# Altium PCB BDCMC_V2.PcbDoc
Units mil, origin at the board's own origin, x right, y up, seen from the top; angles counter-clockwise.
Board outline 7000 x 2000 mil, 4 copper layers (Top Layer, Layer 1, Layer 2, Bottom Layer), stack 68.789 mil thick; 190 components, 102 nets, 647 pads, 27 vias.
Unrouted connection lines stored in the file: 456.
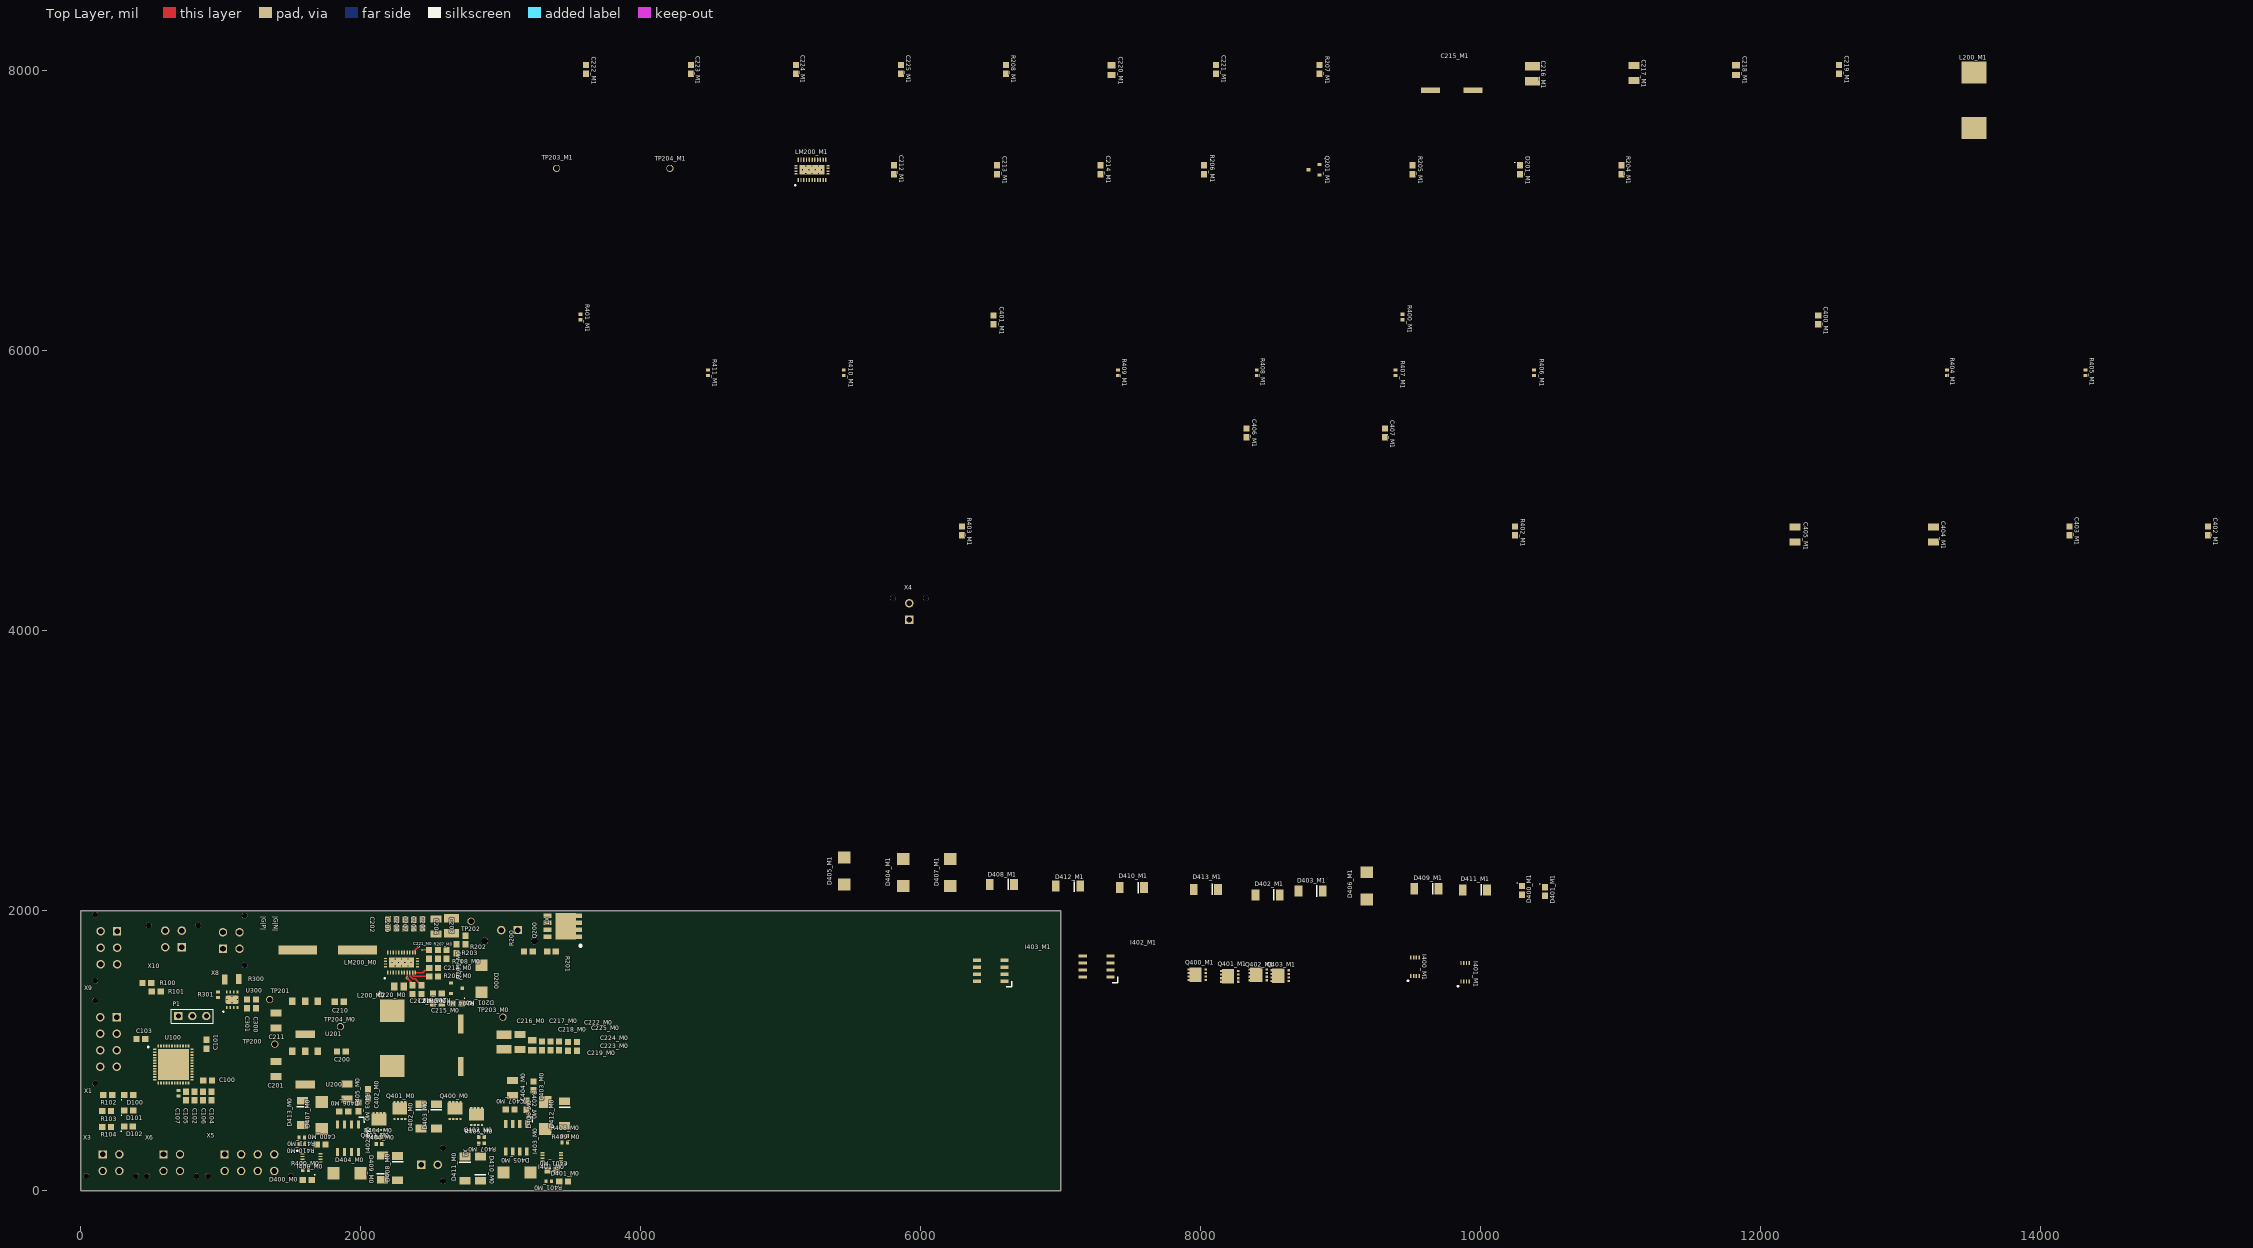
[diagram p0: Top Layer view]
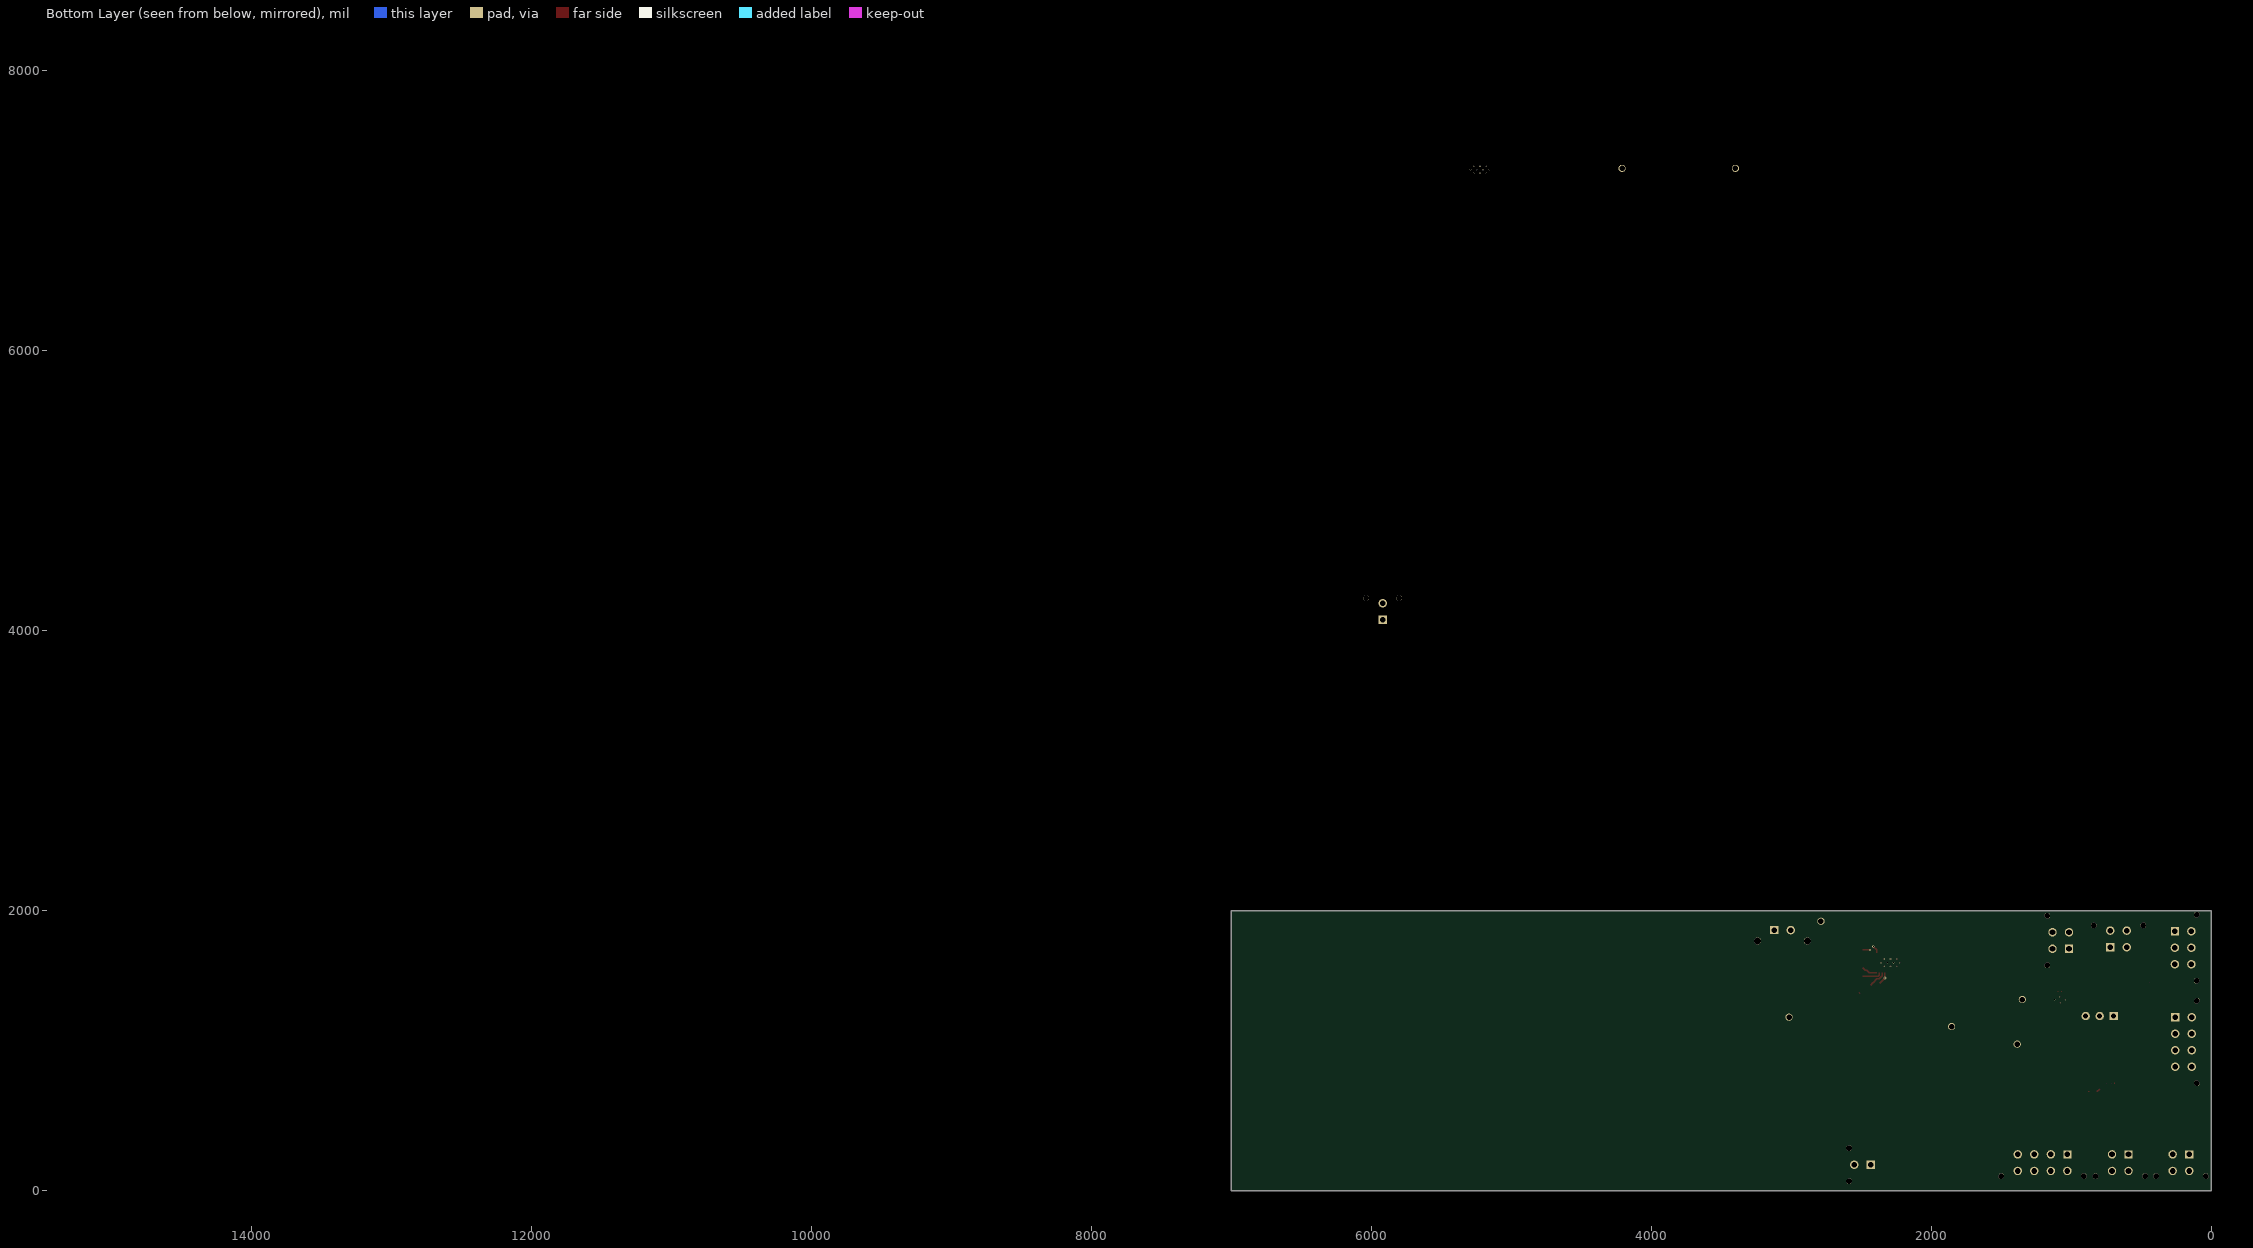
[diagram p1: Bottom Layer view, seen from below]

## Layer stack, top to bottom
Top Solder: solder mask 0.5, Solder Resist, Dk 3.8
Top Layer: signal copper 1.378
Dielectric 2: prepreg 2.8, PP-006, Dk 4.6
Layer 1: signal copper 1.378
Dielectric 1: core 57.677, FR-4, Dk 4.5
Layer 2: signal copper 1.378
Dielectric 3: prepreg 2.8, PP-006, Dk 4.6
Bottom Layer: signal copper 1.378
Bottom Solder: solder mask 0.5, Solder Resist, Dk 3.8

## Board outline
0,0 7000,0 7000,2000 0,2000

## Design rules (kind name [scope] priority, off if disabled: settings)
Clearance [All] p1: gap=10 ignorepadtopadclearanceinfootprint=FALSE except(7: Arc-Arc Arc-Track Arc-SMDPad Track-Track Track-SMDPad SMDPad-SMDPad)
DiffPairsRouting DiffPair_DiffPairsRouting [InDifferentialPair ('CAN')] p1: maxlimit=10 minlimit=5 mostfreqgap=5 toplayer_minwidth=7 toplayer_maxwidth=10 toplayer_prefwidth=7 midlayer1_minwidth=7 midlayer1_maxwidth=10 midlayer1_prefwidth=7 midlayer2_minwidth=7 midlayer2_maxwidth=10 midlayer2_prefwidth=7 bottomlayer_minwidth=7 bottomlayer_maxwidth=10 bottomlayer_prefwidth=7 maxuncoupledlength=500
DiffPairsRouting [All] p2: maxlimit=10 minlimit=10 mostfreqgap=10 toplayer_minwidth=15 toplayer_maxwidth=15 toplayer_prefwidth=15 midlayer1_minwidth=15 midlayer1_maxwidth=15 midlayer1_prefwidth=15 midlayer2_minwidth=15 midlayer2_maxwidth=15 midlayer2_prefwidth=15 bottomlayer_minwidth=15 bottomlayer_maxwidth=15 bottomlayer_prefwidth=15 maxuncoupledlength=500
MatchedLengths DiffPair_MatchedLengths [InDifferentialPair ('CAN')] p1: tolerance=1000 checknetsindiffpair=FALSE checkdiffpairvsdiffpair=TRUE checkxsignals=TRUE checkothers=TRUE
PolygonConnect [All] p1: connectstyle=Relief reliefconductorwidth=10 reliefentries=4 polygonreliefangle="90 Angle" airgapwidth=10
RoutingVias [All] p1: holewidth=28 width=50 viastyle="Through Hole" minholewidth=28 minwidth=50 maxholewidth=28 maxwidth=50
SolderMaskExpansion [All] p1: expansion=4 istentingtop=FALSE
Width [All] p1: maxlimit=10 minlimit=10 preferedwidth=10
29 further rules are at their usual default settings.

## Classes and differential pairs
channel class HB: M0 M1
channel class DirCtl: M0 M1
channel class Buck: M0 M1
component class TCAN1042: C300 C301 R300 R301 U300
component class Power: C200 C201 C202 C203 C204 C205 C206 C207 C208 C209 C210 C211 D200 Q200 R200 R201 R202 R203 TP200 TP201 TP202 U200 U201
component class MCU: C100 C101 C102 C103 C104 C105 C106 C107 D100 D101 D102 R100 R101 R102 R103 R104 U100
component class M1: C400_M1 C401_M1 D400_M1 D401_M1 I400_M1 I401_M1 R400_M1 R401_M1
component class M1: C212_M1 C213_M1 C214_M1 C215_M1 C216_M1 C217_M1 C218_M1 C219_M1 C220_M1 C221_M1 C222_M1 C223_M1 C224_M1 C225_M1 D201_M1 L200_M1 LM200_M1 Q201_M1 R204_M1 R205_M1 R206_M1 R207_M1 R208_M1 TP203_M1 TP204_M1
component class M1: C402_M1 C403_M1 C404_M1 C405_M1 C406_M1 C407_M1 D402_M1 D403_M1 D404_M1 D405_M1 D406_M1 D407_M1 D408_M1 D409_M1 D410_M1 D411_M1 D412_M1 D413_M1 I402_M1 I403_M1 Q400_M1 Q401_M1 Q402_M1 Q403_M1 R402_M1 R403_M1 R404_M1 R405_M1 R406_M1 R407_M1 R408_M1 R409_M1 R410_M1 R411_M1
component class M0: C400_M0 C401_M0 D400_M0 D401_M0 I400_M0 I401_M0 R400_M0 R401_M0
component class M0: C212_M0 C213_M0 C214_M0 C215_M0 C216_M0 C217_M0 C218_M0 C219_M0 C220_M0 C221_M0 C222_M0 C223_M0 C224_M0 C225_M0 D201_M0 L200_M0 LM200_M0 Q201_M0 R204_M0 R205_M0 R206_M0 R207_M0 R208_M0 TP203_M0 TP204_M0
component class M0: C402_M0 C403_M0 C404_M0 C405_M0 C406_M0 C407_M0 D402_M0 D403_M0 D404_M0 D405_M0 D406_M0 D407_M0 D408_M0 D409_M0 D410_M0 D411_M0 D412_M0 D413_M0 I402_M0 I403_M0 Q400_M0 Q401_M0 Q402_M0 Q403_M0 R402_M0 R403_M0 R404_M0 R405_M0 R406_M0 R407_M0 R408_M0 R409_M0 R410_M0 R411_M0
component class Designator: P1 X1 X2 X3 X4 X5 X6 X7 X8 X9 X10
differential pair CAN: +CAN_P -CAN_N

## Components (designator, comment, footprint, x,y, rotation, side; value= is the part's Value field where it differs from the comment)
C100 "TMK107BBJ475KA-T" CAP-0603 905.51,787.4 r0 top
C101 "CC0603KRX7R0BB104" CAP-0603 897.64,1047.24 r90 top
C102 "CC0603KRX7R0BB104" CAP-0603 812.7,677.17 r270 top
C103 "CC0603KRX7R0BB104" CAP-0603 429.13,1083.69 r180 top
C104 "UMK107AB7105KA-T" CAP-0603 935.33,677.17 r270 top
C105 "CC0603KRX7R0BB104" CAP-0603 751.38,677.17 r270 top
C106 "UMK107AB7105KA-T" CAP-0603 874.02,677.17 r270 top
C107 "CC0402KRX7R0BB103" CAP-0402 696.85,696.85 r270 top
C200 "CGA3E3X7R1H334K080AB" CAP-0603 1862.2,996.06 r0 top
C201 "CL31B106KBHNNNE" CAP-1206 1393.7,870.08 r270 top
C202 "100SEV100M12.5X16" ELEC-100U-0001 1763.78,1719.54 r270 top
C203 "C3225X7R1N106K250AC" CAP-1210 2649.61,1893.7 r90 top
C204 "CL31B105KCHNNNE" CAP-1206 2536.18,1887.87 r90 top
C205 "CC0603KRX7R0BB104" CAP-0603 2441.18,1907.87 r90 top
C206 "C1608C0G2A103J080AC" CAP-0603 2378.81,1905.51 r90 top
C207 "C0603Y102K1RAC7867" CAP-0603 2317.49,1905.51 r90 top
C208 "0603N101J101CT" CAP-0603 2256.18,1907.87 r90 top
C209 "0603N100J500CT" CAP-0603 2192.91,1909.45 r90 top
C210 "CGA3E3X7R1H334K080AB" CAP-0603 1846.46,1350.39 r0 top
C211 "CL31B106KBHNNNE" CAP-1206 1393.7,1216.54 r270 top
C212_M0 "UMK107BBJ225KA-T" CAP-0603 2370.08,1437.01 r270 top (schematic designator C212)
C212_M1 "UMK107BBJ225KA-T" CAP-0603 5808.27,7292.64 r90 top (schematic designator C212)
C213_M0 "UMK107BBJ225KA-T" CAP-0603 2433.07,1437.11 r270 top (schematic designator C213)
C213_M1 "UMK107BBJ225KA-T" CAP-0603 6543.27,7292.64 r90 top (schematic designator C213)
C214_M0 "CC0603KRX7R9BB333" CAP-0603 2519.68,1592.23 r0 top (schematic designator C214)
C214_M1 "CC0603KRX7R9BB333" CAP-0603 7283.27,7292.64 r90 top (schematic designator C214)
C215_M0 "50TZV220M10X10.5" ELEC-220U-0003 2712.6,1039.37 r0 top (schematic designator C215)
C215_M1 "50TZV220M10X10.5" ELEC-220U-0003 9792.56,7859.17 r90 top (schematic designator C215)
C216_M0 "C3225X7R1N106K250AC" CAP-1210 3023.62,1062.99 r90 top (schematic designator C216)
C216_M1 "C3225X7R1N106K250AC" CAP-1210 10367.56,7979.17 r90 top (schematic designator C216)
C217_M0 "CL31B105KCHNNNE" CAP-1206 3137.8,1062.99 r90 top (schematic designator C217)
C217_M1 "CL31B105KCHNNNE" CAP-1206 11092.56,7984.17 r90 top (schematic designator C217)
C218_M0 "KAM21KR72A474KL" CAP-0805 3224.41,1039.37 r90 top (schematic designator C218)
C218_M1 "KAM21KR72A474KL" CAP-0805 11822.56,8004.17 r90 top (schematic designator C218)
C219_M0 "CC0603KRX7R0BB104" CAP-0603 3293.01,1035.43 r90 top (schematic designator C219)
C219_M1 "CC0603KRX7R0BB104" CAP-0603 12557.56,8009.17 r90 top (schematic designator C219)
C220_M0 "KAM21KR72A474KL" CAP-0805 2272.44,1460.63 r180 top (schematic designator C220)
C220_M1 "KAM21KR72A474KL" CAP-0805 7362.56,8004.17 r90 top (schematic designator C220)
C221_M0 "885012006087" CAP-0603 2488.19,1688.98 r270 top (schematic designator C221)
C221_M1 "885012006087" CAP-0603 8107.56,8009.17 r90 top (schematic designator C221)
C222_M0 "C1608C0G2A103J080AC" CAP-0603 3356.01,1035.43 r90 top (schematic designator C222)
C222_M1 "C1608C0G2A103J080AC" CAP-0603 3607.56,8009.17 r90 top (schematic designator C222)
C223_M0 "C0603Y102K1RAC7867" CAP-0603 3543.31,1031.5 r90 top (schematic designator C223)
C223_M1 "C0603Y102K1RAC7867" CAP-0603 4357.56,8009.17 r90 top (schematic designator C223)
C224_M0 "0603N101J101CT" CAP-0603 3480.32,1031.5 r90 top (schematic designator C224)
C224_M1 "0603N101J101CT" CAP-0603 5107.56,8009.17 r90 top (schematic designator C224)
C225_M0 "0603N100J500CT" CAP-0603 3417.32,1035.43 r90 top (schematic designator C225)
C225_M1 "0603N100J500CT" CAP-0603 5857.56,8009.17 r90 top (schematic designator C225)
C300 "TMK107BBJ475KA-T" CAP-0603 1251.02,1335 r90 top
C301 "CC0603KRX7R0BB104" CAP-0603 1186.02,1335 r90 top
C400_M0 "CC0603KRX7R0BB104" CAP-0603 1716.51,331.58 r180 top (schematic designator C400)
C400_M1 "CC0603KRX7R0BB104" CAP-0603 12410,6220 r90 top (schematic designator C400)
C401_M0 "CC0603KRX7R0BB104" CAP-0603 3366.11,146.86 r180 top (schematic designator C401)
C401_M1 "CC0603KRX7R0BB104" CAP-0603 6520,6220 r90 top (schematic designator C401)
C402_M0 "C1608C0G2A103J080AC" CAP-0603 2051.15,693.79 r90 top (schematic designator C402)
C402_M1 "C1608C0G2A103J080AC" CAP-0603 15194.06,4712.76 r90 top (schematic designator C402)
C403_M0 "C1608C0G2A103J080AC" CAP-0603 3233.99,748.9 r90 top (schematic designator C403)
C403_M1 "C1608C0G2A103J080AC" CAP-0603 14204.06,4712.76 r90 top (schematic designator C403)
C404_M0 "CAP-1U-0001" "CAP-1206 - duplicate" 3082.65,729.22 r90 top (schematic designator C404)
C404_M1 "CAP-1U-0001" "CAP-1206 - duplicate" 13234.06,4682.76 r90 top (schematic designator C404)
C405_M0 "CAP-1U-0001" CAP-1206 1901.55,709.53 r90 top (schematic designator C405)
C405_M1 "CAP-1U-0001" CAP-1206 12244.06,4687.76 r90 top (schematic designator C405)
C406_M0 "CC0603KRX7R0BB104" CAP-0603 1877.92,567.8 r180 top (schematic designator C406)
C406_M1 "CC0603KRX7R0BB104" CAP-0603 8325,5413.54 r90 top (schematic designator C406)
C407_M0 "CC0603KRX7R0BB104" CAP-0603 3066.9,579.61 r180 top (schematic designator C407)
C407_M1 "CC0603KRX7R0BB104" CAP-0603 9315,5413.54 r90 top (schematic designator C407)
D100 "150060AS75000" LED-0603 342.52,685.04 r180 top
D101 "150060AS75000" LED-0603 342.52,574.8 r180 top
D102 "150060AS75000" LED-0603 341.02,458.87 r180 top
D200 "SMBJE43CAH" "DO-214AA (SMBJ)" 2862.2,1515.75 r270 top
D201_M0 "150060AS75000" LED-0603 2688.98,1339.36 r0 top (schematic designator D201)
D201_M1 "150060AS75000" LED-0603 10278.27,7292.64 r90 top (schematic designator D201)
D400_M0 "150060AS75000" LED-0603 1618.08,78.75 r0 top (schematic designator D400)
D400_M1 "150060AS75000" LED-0603 10295.28,2145.67 r90 top (schematic designator D400)
D401_M0 "150060AS75000" LED-0603 3448.79,67.8 r0 top (schematic designator D401)
D401_M1 "150060AS75000" LED-0603 10456.69,2137.8 r90 top (schematic designator D401)
D402_M0 "PMEG6030EP,115" DIO-SOD128 2430.91,532.37 r180 top (schematic designator D402)
D402_M1 "PMEG6030EP,115" DIO-SOD128 8476.38,2114.17 r90 top (schematic designator D402)
D403_M0 "PMEG6030EP,115" DIO-SOD128 2539.34,532.37 r180 top (schematic designator D403)
D403_M1 "PMEG6030EP,115" DIO-SOD128 8783.46,2141.73 r90 top (schematic designator D403)
D404_M0 "SMBJ12CA" "DO-214AA (SMBJ)" 1901.55,126.94 r0 top (schematic designator D404)
D404_M1 "SMBJ12CA" "DO-214AA (SMBJ)" 5874.02,2272.28 r90 top (schematic designator D404)
D405_M0 "SMBJ12CA" "DO-214AA (SMBJ)" 3118.08,130.87 r180 top (schematic designator D405)
D405_M1 "SMBJ12CA" "DO-214AA (SMBJ)" 5452.76,2283.46 r90 top (schematic designator D405)
D406_M0 "SMBJ12CA" "DO-214AA (SMBJ)" 3316.99,536.44 r90 top (schematic designator D406)
D406_M1 "SMBJ12CA" "DO-214AA (SMBJ)" 9185.04,2177.17 r90 top (schematic designator D406)
D407_M0 "SMBJ12CA" "DO-214AA (SMBJ)" 1720.44,536.31 r90 top (schematic designator D407)
D407_M1 "SMBJ12CA" "DO-214AA (SMBJ)" 6208.66,2271.65 r90 top (schematic designator D407)
D408_M0 "PMEG6030EP,115" DIO-SOD128 2263.75,162.37 r180 top (schematic designator D408)
D408_M1 "PMEG6030EP,115" DIO-SOD128 6578.74,2188.98 r90 top (schematic designator D408)
D409_M0 "PMEG6030EP,115" DIO-SOD128 2153.52,166.31 r0 top (schematic designator D409)
D409_M1 "PMEG6030EP,115" DIO-SOD128 9610.24,2157.48 r90 top (schematic designator D409)
D410_M0 "PMEG6030EP,115" DIO-SOD128 2854.3,158.43 r0 top (schematic designator D410)
D410_M1 "PMEG6030EP,115" DIO-SOD128 7507.87,2165.35 r90 top (schematic designator D410)
D411_M0 "PMEG6030EP,115" DIO-SOD128 2744.07,158.43 r180 top (schematic designator D411)
D411_M1 "PMEG6030EP,115" DIO-SOD128 9956.69,2149.61 r90 top (schematic designator D411)
D412_M0 "PMEG6030EP,115" DIO-SOD128 3456.67,552.05 r180 top (schematic designator D412)
D412_M1 "PMEG6030EP,115" DIO-SOD128 7051.18,2177.17 r90 top (schematic designator D412)
D413_M0 "PMEG6030EP,115" DIO-SOD128 1582.65,555.99 r180 top (schematic designator D413)
D413_M1 "PMEG6030EP,115" DIO-SOD128 8035.43,2153.54 r90 top (schematic designator D413)
I400_M0 "SN74LVC2G157DCUR" IC-MUX-8VSSOP 1582.65,205.92 r0 top (schematic designator I400)
I400_M1 "SN74LVC2G157DCUR" IC-MUX-8VSSOP 9559.06,1535.43 r90 top (schematic designator I400)
I401_M0 "SN74LVC2G157DCUR" IC-MUX-8VSSOP 3429.11,272.53 r180 top (schematic designator I401)
I401_M1 "SN74LVC2G157DCUR" IC-MUX-8VSSOP 9917.32,1496.06 r90 top (schematic designator I401)
I402_M0 "UCC27284QDQ1" IC-BUCK-8SOIC 1909.42,374.97 r180 top (schematic designator I402)
I402_M1 "UCC27284QDQ1" IC-BUCK-8SOIC 7255.91,1602.36 r90 top (schematic designator I402)
I403_M0 "UCC27284QDQ1" IC-BUCK-8SOIC 3110.21,378.91 r180 top (schematic designator I403)
I403_M1 "UCC27284QDQ1" IC-BUCK-8SOIC 6500,1570.87 r90 top (schematic designator I403)
L200_M0 "SRP1270-100M" PWRIND-10U-0002 2224.41,1089.27 r270 top (schematic designator L200)
L200_M1 "SRP1270-100M" PWRIND-10U-0002 13522.56,7789.17 r90 top (schematic designator L200)
LM200_M0 "LM76005RNPR" IC-30-WQFN(6x4) 2291.34,1629.92 r90 top (schematic designator LM200)
LM200_M1 "LM76005RNPR" IC-30-WQFN(6x4) 5223.27,7292.64 r90 top (schematic designator LM200)
P1 "Header 3" HDR1X3 696.85,1248.03 r0 top
Q200 "TPH7R006PL,L1Q" NMOS-8PowerVDFN 3554.57,1814.76 r90 top
Q201_M0 "T2N7002AK,LM" NMOS-SOT23-3 2685.04,1446.85 r270 top (schematic designator Q201)
Q201_M1 "T2N7002AK,LM" NMOS-SOT23-3 8808.27,7292.64 r90 top (schematic designator Q201)
Q400_M0 "TPN11006PL,LQ" NMOS-8TSON 2673.2,573.71 r0 top (schematic designator Q400)
Q400_M1 "TPN11006PL,LQ" NMOS-8TSON 7974.41,1543.31 r90 top (schematic designator Q400)
Q401_M0 "TPN11006PL,LQ" NMOS-8TSON 2279.5,573.71 r0 top (schematic designator Q401)
Q401_M1 "TPN11006PL,LQ" NMOS-8TSON 8206.69,1531.5 r90 top (schematic designator Q401)
Q402_M0 "TPN11006PL,LQ" NMOS-8TSON 2826.74,530.48 r0 top (schematic designator Q402)
Q402_M1 "TPN11006PL,LQ" NMOS-8TSON 8409.45,1542.32 r90 top (schematic designator Q402)
Q403_M0 "TPN11006PL,LQ" NMOS-8TSON 2129.89,495.05 r0 top (schematic designator Q403)
Q403_M1 "TPN11006PL,LQ" NMOS-8TSON 8566.93,1536.42 r90 top (schematic designator Q403)
R100 "AF0603FR-074K7L" RES-0603 472.44,1484.25 r0 top
R101 "AF0603FR-074K7L" RES-0603 539.37,1422.93 r180 top
R102 "AC0603FR-10100RL" RES-0603 192.91,685.04 r180 top
R103 "AC0603FR-10100RL" RES-0603 185.04,570.87 r180 top
R104 "AC0603FR-10100RL" RES-0603 185.04,456.69 r180 top
R200 "ERJ-3EKF2003V" RES-0603 3196.85,1708.66 r180 top
R201 "RC0603FR-07100KL" RES-0603 3362.2,1708.66 r0 top
R202 "RC0603FR-072M15L" RES-0603 2748.03,1791.34 r90 top
R203 "RC0603FR-07100KL" RES-0603 2685.04,1728.35 r270 top
R204_M0 "AC0603FR-10100RL" RES-0603 2547.24,1338.58 r0 top (schematic designator R204)
R204_M1 "AC0603FR-10100RL" RES-0603 11003.27,7292.64 r90 top (schematic designator R204)
R205_M0 "RC0603FR-0710KP" RES-0603 2547.24,1409.45 r180 top (schematic designator R205)
R205_M1 "RC0603FR-0710KP" RES-0603 9513.27,7292.64 r90 top (schematic designator R205)
R206_M0 "RC0603FR-0776K8L" RES-0603 2519.68,1530.91 r0 top (schematic designator R206)
R206_M1 "RC0603FR-0776K8L" RES-0603 8023.27,7292.64 r90 top (schematic designator R206)
R207_M0 "RC0603FR-07100KL" RES-0603 2551.18,1688.98 r270 top (schematic designator R207)
R207_M1 "RC0603FR-07100KL" RES-0603 8847.56,8009.17 r90 top (schematic designator R207)
R208_M0 "RC0603FR-079K09L" RES-0603 2612.5,1688.98 r90 top (schematic designator R208)
R208_M1 "RC0603FR-079K09L" RES-0603 6607.56,8009.17 r90 top (schematic designator R208)
R300 "CRGH1206F120R" RES-1206 1078.74,1511.81 r180 top
R301 "RC0402FR-074K7P" RES-0402 981.02,1400 r270 top
R400_M0 "RC0402JR-07100RP" RES-0402 1606.27,146.54 r180 top (schematic designator R400)
R400_M1 "RC0402JR-07100RP" RES-0402 9440,6240 r90 top (schematic designator R400)
R401_M0 "RC0402JR-07100RP" RES-0402 3342.49,67.8 r0 top (schematic designator R401)
R401_M1 "RC0402JR-07100RP" RES-0402 3570,6240 r90 top (schematic designator R401)
R402_M0 "RNCP0603FTD1R00" RES-0603 3185.01,611.11 r90 top (schematic designator R402)
R402_M1 "RNCP0603FTD1R00" RES-0603 10244.06,4712.76 r90 top (schematic designator R402)
R403_M0 "RNCP0603FTD1R00" RES-0603 1984.22,599.3 r90 top (schematic designator R403)
R403_M1 "RNCP0603FTD1R00" RES-0603 6294.06,4712.76 r90 top (schematic designator R403)
R404_M0 "RC0402JR-0733RP" RES-0402 2129.89,383.43 r180 top (schematic designator R404)
R404_M1 "RC0402JR-0733RP" RES-0402 13329.13,5842.99 r90 top (schematic designator R404)
R405_M0 "RC0402JR-0733RP" RES-0402 2862.18,385.1 r180 top (schematic designator R405)
R405_M1 "RC0402JR-0733RP" RES-0402 14319.13,5842.99 r90 top (schematic designator R405)
R406_M0 "RC0402JR-0733RP" RES-0402 2129.89,335.6 r180 top (schematic designator R406)
R406_M1 "RC0402JR-0733RP" RES-0402 10379.13,5842.99 r90 top (schematic designator R406)
R407_M0 "RC0402JR-0733RP" RES-0402 2862.18,339.54 r0 top (schematic designator R407)
R407_M1 "RC0402JR-0733RP" RES-0402 9389.13,5842.99 r90 top (schematic designator R407)
R408_M0 "RC0402JR-0733RP" RES-0402 3456.66,391.5 r180 top (schematic designator R408)
R408_M1 "RC0402JR-0733RP" RES-0402 8399.13,5842.99 r90 top (schematic designator R408)
R409_M0 "RC0402JR-0733RP" RES-0402 3456.66,344.25 r180 top (schematic designator R409)
R409_M1 "RC0402JR-0733RP" RES-0402 7409.13,5842.99 r90 top (schematic designator R409)
R410_M0 "RC0402JR-0733RP" RES-0402 1578.71,335.52 r0 top (schematic designator R410)
R410_M1 "RC0402JR-0733RP" RES-0402 5449.13,5842.99 r90 top (schematic designator R410)
R411_M0 "RC0402JR-0733RP" RES-0402 1578.71,381.09 r0 top (schematic designator R411)
R411_M1 "RC0402JR-0733RP" RES-0402 4479.13,5842.99 r90 top (schematic designator R411)
TP200 "5003" TEST-POINT-0001 1385.83,1047.24 r90 top
TP201 "5003" TEST-POINT-0001 1349.38,1366.14 r90 top
TP202 "5003" TEST-POINT-0001 2787.4,1925.2 r90 top
TP203_M0 "5003" TEST-POINT-0001 3015.75,1240.16 r90 top (schematic designator TP203)
TP203_M1 "5003" TEST-POINT-0001 3398.27,7302.64 r90 top (schematic designator TP203)
TP204_M0 "5003" TEST-POINT-0001 1854.33,1173.23 r90 top (schematic designator TP204)
TP204_M1 "5003" TEST-POINT-0001 4208.27,7302.64 r90 top (schematic designator TP204)
U100 "STM32G431CBU6" MCU-UFQFPN48 661.42,901.57 r0 top
U200 "UA78M33CDCYR" IC-SOT-223-4 1602.36,877.95 r270 top
U201 "UA78M05IDCYR" IC-SOT-223-4 1602.36,1236.22 r270 top
U300 "TCAN1042HGDRBTQ1" IC-8-VSON 1081.02,1365 r90 top
X1 "Molex 43045-0812" 43045-0812 257.48,1063 r90 top
X2 "Molex - Micro-Fit 3.0 Series connector,  3.00mm (0.118\") pitch header, 2 positions." 43045-0212 2431.81,185.99 r270 top
X3 "Molex 43045-0412" 43045-0412 216.53,259.84 r180 top
X4 "Molex - Micro-Fit 3.0 Series connector,  3.00mm (0.118\") pitch header, 2 positions." 43045-0212 5917.32,4078.74 r0 top
X5 "Molex 43045-0812" 43045-0812 1204.73,259.84 r180 top
X6 "Molex 43045-0412" 43045-0412 649.6,259.84 r180 top
X7 "Molex 43650-0215" 43650-0215 3062.45,1862.2 r0 top
X8 "Molex 43045-0412" 43045-0412 1015.75,1787.4 r270 top
X9 "Molex 43045-0612" 43045-0612 259.84,1736.22 r90 top
X10 "Molex 43045-0412" 43045-0412 662.08,1740.16 r0 top

## Footprints (in the part's own frame and the unit in brackets; to place one, negate y for a bottom-side part, rotate by r counter-clockwise, add the part's x,y. Pads: shape width x height; smd on the part's side, far side on the other; paste and mask are expansions set on the pad)
43045-0212 [mm]
  round 1.02 hole 1.02 unplated: 1(-3,3.94) 1(3,3.94)
  rect 1.482x1.482 / inner rect 1.524x1.524 / far side rect 1.482x1.482 hole 1.02: P$1(0,0)
  round 1.53 / inner round 1.524 / far side round 1.53 hole 1.02: P$2(0,3)
43045-0412 [mm]
  round 1.02 hole 1.02 unplated: 1(-4.5,3.94) 1(4.5,3.94)
  rect 1.482x1.482 / inner rect 1.524x1.524 / far side rect 1.482x1.482 hole 1.02: P$1(1.5,0)
  round 1.53 / inner round 1.524 / far side round 1.53 hole 1.02: P$2(-1.5,0) P$3(1.5,3) P$4(-1.5,3)
  body extent -5.07,-2.45 5.08,6.32, height 10.03
43045-0612 [mm]
  round 1.02 hole 1.02 unplated: 1(-6,3.94) 1(6,3.94)
  rect 1.482x1.482 / inner rect 1.524x1.524 / far side rect 1.482x1.482 hole 1.02: P$1(3,0)
  round 1.53 / inner round 1.524 / far side round 1.53 hole 1.02: P$2(0,0) P$3(-3,0) P$4(3,3) P$5(0,3) P$6(-3,3)
  body extent -6.57,-2.45 6.58,6.32, height 10.03
43045-0812 [mm]
  round 1.02 hole 1.02 unplated: 1(-7.5,3.94) 1(7.5,3.94)
  rect 1.482x1.482 / inner rect 1.524x1.524 / far side rect 1.482x1.482 hole 1.02: P$1(4.5,0)
  round 1.53 / inner round 1.524 / far side round 1.53 hole 1.02: P$2(1.5,0) P$3(-1.5,0) P$4(-4.5,0) P$5(4.5,3) P$6(1.5,3) P$7(-1.5,3) P$8(-4.5,3)
  body extent -8.07,-2.45 8.08,6.32, height 10.03
43650-0215 [mil]
  round 50 hole 50 unplated: 1(-177.17,-77.17) 1(177.17,-77.17)
  rect 58.33x58.33 / inner rect 60x60 / far side rect 58.33x58.33 hole 40.16: P$1(59.06,0)
  round 60.24 / inner round 60 / far side round 60.24 hole 40.16: P$2(-59.06,0)
  body extent -190,-97 190,123, height 395
CAP-0402 [mm]
  rect 0.6x0.7 smd: 1(-0.5,0) 2(0.5,0)
  body extent -0.5,-0.22 0.5,0.23, height 0.5
CAP-0603 [mm]
  rect 1.15x1.1 smd: 1(-0.8,0) 2(0.8,0)
  body extent -0.8,-0.45 0.8,0.45, height 0.8
CAP-0805 [mm]
  rect 1.16x1.47 smd: 1(-0.88,0) 2(0.88,0)
  body extent -1,-0.63 1,0.63, height 0.94
CAP-1206 [mm]
  rect 1.25x2 smd: 1(-1.375,0) 2(1.375,0)
  body extent -1.6,-0.8 1.6,0.8, height 1.5
"CAP-1206 - duplicate" [mm]
  rect 1.25x2 smd: 1(-1.248,0) 2(1.502,0)
  body extent -1.47,-0.8 1.73,0.8, height 1.5
CAP-1210 [mm]
  rect 1.53x2.72 smd: 1(-1.341,0) 2(1.341,0)
  body extent -1.6,-1.25 1.6,1.25, height 2.7
DIO-SOD128 [mm]
  rect 2x1.4 smd: 1(0,2.2) 2(0,-2.2)
  silkscreen extent -1.02,-1.14 1.02,-1.14, body extent -1.25,-2.35 1.25,2.35, height 1.05
"DO-214AA (SMBJ)" [mm]
  rect 2.16x2.26 smd: 1(-2.416,0) 2(2.484,0)
  body extent -2.72,-1.95 2.78,1.95, height 2.45
ELEC-100U-0001 [mm]
  rect 1.6x7 smd: 1(0,5.4) 2(0,-5.4)
  silkscreen extent 7.45,9.08 8.13,9.82, body extent -6.6,-7.15 6.6,7.15, height 16.56
ELEC-220U-0003 [mm]
  rect 1x3.5 smd: 1(0,-3.85) 2(0,3.85)
  body extent -5.25,-5.45 5.25,5.45, height 10.54
HDR1X3 [mm] "Connector; Header; 3 Position"
  rect 1.5x1.5 hole 0.9: 1(0,0)
  round 1.5 hole 0.9: 2(2.54,0) 3(5.08,0)
  silkscreen extent -1.27,-1.27 6.35,1.27
IC-8-VSON [mm]
  rrect50% 0.6x0.3 smd mask+0.07: 1(-1.4,0.975) 2(-1.4,0.325) 3(-1.4,-0.325) 4(-1.4,-0.975) 5(1.4,-0.975) 6(1.4,-0.325) 7(1.4,0.325) 8(1.4,0.975)
  rrect50% 1.6x2.4 smd: 9(0,0)
  silkscreen extent -2.27,1.48 -2.08,1.66, body extent -1.5,-1.5 1.5,1.5, height 1
IC-30-WQFN(6x4) [mm] "30 pin WQFN with exposed pad"
  rrect50% 0.75x0.25 smd mask+0.07: 1(-1.825,2.5) 2(-1.825,2) 3(-1.825,1.5) 4(-1.825,1) 5(-1.825,0.5) 6(-1.825,0) 7(-1.825,-0.5) 8(-1.825,-1) 9(-1.825,-1.5) 10(-1.825,-2) 11(-1.825,-2.5) 16(1.825,-2.5) 17(1.825,-2) 18(1.825,-1.5) 19(1.825,-1) 20(1.825,-0.5) 21(1.825,0) 22(1.825,0.5) 23(1.825,1) 24(1.825,1.5) 25(1.825,2) 26(1.825,2.5)
  rrect50% 0.25x0.6 smd mask+0.07: 12(-0.75,-2.9) 13(-0.25,-2.9) 14(0.25,-2.9) 15(0.75,-2.9) 27(0.75,2.9) 28(0.25,2.9) 29(-0.25,2.9) 30(-0.75,2.9)
  rect 1.8x4.5 smd: 31(0,0)
  silkscreen extent -2.94,2.96 -2.71,3.19, body extent -2,-3 2,3, height 0.8
IC-BUCK-8SOIC [mm]
  rect 0.6x1.5 smd: 1(-1.905,-2.5) 2(-0.635,-2.5) 3(0.635,-2.5) 4(1.905,-2.5) 5(1.905,2.5) 6(0.635,2.5) 7(-0.635,2.5) 8(-1.905,2.5)
  silkscreen extent -2.92,-3.81 -1.9,-2.79, body extent -2.45,-3 2.45,3, height 1.75
IC-MUX-8VSSOP [mm]
  rect 0.75x0.25 smd: 1(0,1.5) 2(0,1) 3(0,0.5) 4(0,0) 5(3.3,0) 6(3.3,0.5) 7(3.3,1) 8(3.3,1.5)
  silkscreen extent -1.02,1.91 -0.76,2.16, body extent 0.1,-0.24 3.2,1.76, height 0.9
IC-SOT-223-4 [mm]
  rect 1.4x1.2 smd mask+0.07: 1(-3,2.3) 2(-3,0) 3(-3,-2.3)
  rect 1.4x3.5 smd: 2(3,0)
  body extent -3.5,-3.25 3.5,3.25, height 1.68
LED-0603 [mm]
  rect 1.15x1.1 smd: 1(-0.8,0) 2(0.8,0)
  silkscreen extent 1.27,0.89 1.4,0.89, body extent -0.8,-0.3 0.8,0.3, height 1
MCU-UFQFPN48 [mm] "STM32G431CBU6"
  rect 0.55x0.3 smd mask+0.07: 1(-3.375,2.75) 2(-3.375,2.25) 3(-3.375,1.75) 4(-3.375,1.25) 5(-3.375,0.75) 6(-3.375,0.25) 7(-3.375,-0.25) 8(-3.375,-0.75) 9(-3.375,-1.25) 10(-3.375,-1.75) 11(-3.375,-2.25) 12(-3.375,-2.75) 25(3.375,-2.75) 26(3.375,-2.25) 27(3.375,-1.75) 28(3.375,-1.25) 29(3.375,-0.75) 30(3.375,-0.25) 31(3.375,0.25) 32(3.375,0.75) 33(3.375,1.25) 34(3.375,1.75) 35(3.375,2.25) 36(3.375,2.75)
  rect 0.3x0.55 smd mask+0.07: 13(-2.75,-3.375) 14(-2.25,-3.375) 15(-1.75,-3.375) 16(-1.25,-3.375) 17(-0.75,-3.375) 18(-0.25,-3.375) 19(0.25,-3.375) 20(0.75,-3.375) 21(1.25,-3.375) 22(1.75,-3.375) 23(2.25,-3.375) 24(2.75,-3.375) 37(2.75,3.375) 38(2.25,3.375) 39(1.75,3.375) 40(1.25,3.375) 41(0.75,3.375) 42(0.25,3.375) 43(-0.25,3.375) 44(-0.75,3.375) 45(-1.25,3.375) 46(-1.75,3.375) 47(-2.25,3.375) 48(-2.75,3.375)
  rect 5.6x5.6 smd: 49(0,0)
  silkscreen extent -4.67,3.08 -4.43,3.32, body extent -3.56,-3.56 3.56,3.56, height 0.61
NMOS-8PowerVDFN [mm]
  rect 0.85x1.45 smd: 1(0,5.588) 2(1.27,5.588) 2(2.54,5.588) 2(3.81,5.588)
  rect 0.85x1.05 smd: 3(0,-0.112) 3(1.27,-0.112) 3(2.54,-0.112) 3(3.81,-0.112)
  rect 4.8x3.75 smd: 3(1.905,2.286)
  silkscreen extent -1.91,-0.64 -1.4,-0.13
NMOS-8TSON [mm]
  rect 0.4x0.4 smd: 1(0.975,-1.55) 2(-0.975,-1.55) 2(-0.325,-1.55) 2(0.325,-1.55)
  rect 0.4x0.3 smd: 3(-0.975,1.6) 3(-0.325,1.6) 3(0.325,1.6) 3(0.975,1.6)
  rect 2.65x2.2 smd: 3(0,0.35)
  body extent -1.65,-1.65 1.65,1.65, height 0.85
NMOS-SOT23-3 [mm]
  rect 0.6x0.7 smd: 1(-0.95,-1) 2(0.95,-1) 3(0,1)
  body extent -1.46,-1.18 1.46,1.19, height 1.12
PWRIND-10U-0002 [mm]
  rect 4x4.5 smd: 1(-5,0) 2(5,0)
  body extent -6.85,-6.45 6.85,6.45, height 7.06
RES-0402 [mm]
  rect 0.6x0.7 smd: 1(-0.5,0) 2(0.5,0)
  body extent -0.5,-0.25 0.5,0.25, height 0.3
RES-0603 [mm]
  rect 1.15x1.1 smd: 1(-0.8,0) 2(0.8,0)
  body extent -0.8,-0.4 0.8,0.4, height 0.43
RES-1206 [mm]
  rect 1.05x1.8 smd: 1(-1.275,0) 2(1.275,0.043)
  body extent -1.6,-0.77 1.6,0.82, height 0.55
TEST-POINT-0001 [mm] "2024 miniature test point"
  round 1.3 hole 1: 1(0,0)
  body extent -1.27,-1.27 1.27,1.27, height 4.57

## Part data
C100: library part CAP-4.7U-0001, "4.7 µF ±10% 25V Ceramic Capacitor X5R 0603 (1608 Metric)", Capacitance="4.7 uF", Manufacturer="Taiyo Yuden", Package Size=0603, Temperature Coefficient=X5R, Tolerance=10%, Voltage Rating=25V, Assembled?=no, Manufacturer Part Number=TMK107BBJ475KA-T
C101 C102 C103 C105 C205: library part CAP-100N-0001, "CAP CER 0.1UF 100V X7R 0603", Capacitance="100 nF", Manufacturer=YAGEO, Package Size=0603, Temperature Coefficient=X7R, Tolerance=10%, Voltage Rating=100V, Assembled?=no, Manufacturer Part Number=CC0603KRX7R0BB104
C104 C106: library part CAP-1U-0002, "1 µF ±10% 50V Ceramic Capacitor X7R 0603 (1608 Metric)", Capacitance="1 uF", Package Size=0603, Tolerance=10%, Voltage=50V
C107: library part CAP-10N-0001, "10000 pF ±10% 100V Ceramic Capacitor X7R 0402 (1005 Metric)", Capacitance="10 nF", Manufacturer=YAGEO, Package Size=0402, Temperature Coefficient=X7R, Tolerance=10%, Voltage Rating=100V, Assembled?=no, Manufacturer Part Number=CC0402KRX7R0BB103
C200 C210: library part CAP-0.33uF-0001, "0.33 µF ±10% 50V Ceramic Capacitor X7R 0603 (1608 Metric)", Capacitance="0.33 uF", Manufacturer="TDK Corporation", Temperature Coefficient=X7R, Tolerance=10%, Voltage=50V, Manufacturer Part Number=CGA3E3X7R1H334K080AB
C201 C211: library part CAP-10U-0001, "10 µF ±10% 50V Ceramic Capacitor X7R 1206 (3216 Metric)", Capacitance="10 uF", Manufacturer="Samsung Electro-Mechanics", Package Size=1206, Temperature Coefficient=X7R, Tolerance=10%, Voltage Rating=50V, Assembled?=no, Manufacturer Part Number=CL31B106KBHNNNE
C202: library part ELEC-100U-0001, "100 µF 100 V Aluminum Electrolytic Capacitors Radial, Can - SMD 2000 Hrs @ 85°C", Capacitance="100 uF", Manufacturer=Rubycon, Tolerance=20%, Voltage="100 V", Assembled?=No, ESR="idk check the datasheet i couldnt find it"
C203: library part CAP-10U-0004, "10 µF ±10% 75V Ceramic Capacitor X7R 1210 (3225 Metric)", Capacitance="10 uF", Tolerance=10%, Voltage Rating=75V
C204: library part CAP-1U-0001, "1 µF ±10% 100V Ceramic Capacitor X7R 1206 (3216 Metric)", Capacitance="1 uF", Tolerance=10%, Voltage=100V
C206: library part CAP-10N-0002, "CAP CER 10000PF 100V C0G 0603", Capacitance="10 nF", Manufacturer="TDK Corporation", Package Size=0603, Temperature Coefficient=C0G/NP0, Tolerance=5%, Voltage Rating=100V, Assembled?=no, Manufacturer Part Number=C1608C0G2A103J080AC
C207: library part CAP-1N-0001, "1000 pF ±10% 100V Ceramic Capacitor X7R 0603 (1608 Metric)", Capacitance="1 nF", Tolerance=10%, Voltage=100V
C208: library part CAP-100P-0002, "100 pF ±5% 100V Ceramic Capacitor C0G, NP0 0603 (1608 Metric)", Capacitance="100 pF", Package Size=0603, Temp Coeff=C0G/NP0, Tolerance=5%, Voltage=100V
C209: library part CAP-10P-0001, "10 pF ±5% 50V Ceramic Capacitor C0G, NP0 0603 (1608 Metric)", Capacitance="10 pF", Manufacturer="Walshin Technology Corporation", Package Size=0603, Temperature Coefficient="C0G, NP0", Tolerance=5%, Voltage Rating=50V, Assembled?=Yes, Manufacturer Part Number=0603N100J500CT
C212_M0 C212_M1 C213_M0 C213_M1: library part CAP-2.2U-0001, "2.2 µF ±10% 50V Ceramic Capacitor X5R 0603 (1608 Metric)", Capacitance="2.2 uF", Tolerance=10%, oltage=50V
C214_M0 C214_M1: library part CAP-33N-0001, "0.033 µF ±10% 50V Ceramic Capacitor X7R 0603 (1608 Metric)", Capacitance="33 nF", Manufacturer=YAGEO, Package Size=0603, Temperature Coefficient=X7R, Tolerance=10%, Voltage Rating=50V, Assembled?=no, Manufacturer Part Number=CC0603KRX7R9BB333
C215_M0 C215_M1: library part ELEC-220U-0003, "220 µF 50 V Aluminum Electrolytic Capacitors Radial, Can - SMD 2000 Hrs @ 105°C", Capacitance="220 uF +/- 20%", Voltage Rating=50V, Size=.406inx.406in*.413in
C216_M0 C216_M1: library part CAP-10U-0004, "10 µF ±10% 75V Ceramic Capacitor X7R 1210 (3225 Metric)", Capacitance="10 uF +/- 10%", Voltage Rating=75V
C217_M0 C217_M1: library part CAP-1U-0001, "1 µF ±10% 100V Ceramic Capacitor X7R 1206 (3216 Metric)", Capacitance="1 uF +/- 10%", Voltage=100V
C218_M0 C218_M1 C220_M0 C220_M1: library part CAP-0.47U-0001, "0.47 µF ±10% 100V Ceramic Capacitor X7R 0805 (2012 Metric)", Capacitance="0.47 uF", Package Size=0805, Temperature Coefficient=X7R, Tolerance="+/- 10%", Voltage=100V, Assembled?=No
C219_M0 C219_M1 C301 C400_M0 C400_M1 C401_M0 C401_M1 C406_M0 C406_M1 C407_M0 C407_M1: library part CAP-100N-0001, "CAP CER 0.1UF 100V X7R 0603", Capacitance="100nF +/-10%", Manufacturer=YAGEO, Package Size=0603, Temperature Coefficient=X7R, Voltage Rating=100V, Assembled?=no, Manufacturer Part Number=CC0603KRX7R0BB104
C221_M0 C221_M1: library part CAP-1P-0001, "1 pF ±0.25pF 100V Ceramic Capacitor C0G, NP0 0603 (1608 Metric)", Capacitance="1 pF", Package Size=0603, Temperature Coefficient=C0G/NP0, Tolerance="+/- 0.25 pF", Voltage=100V, Assembled?=No
C222_M0 C222_M1 C402_M0 C402_M1 C403_M0 C403_M1: library part CAP-10N-0002, "CAP CER 10000PF 100V C0G 0603", Capacitance="10nF +/-5%", Manufacturer="TDK Corporation", Package Size=0603, Temperature Coefficient=C0G/NP0, Voltage Rating=100V, Assembled?=no, Manufacturer Part Number=C1608C0G2A103J080AC
C223_M0 C223_M1: library part CAP-1N-0001, "1000 pF ±10% 100V Ceramic Capacitor X7R 0603 (1608 Metric)", Capacitance="1 nF +/-10%", Voltage=100V
C224_M0 C224_M1: library part CAP-100P-0002, "100 pF ±5% 100V Ceramic Capacitor C0G, NP0 0603 (1608 Metric)", Capacitance="100 pF", Package Size=0603, Temp Coeff=C0G/NP0, Tolerance=+/-5%, Voltage=100V
C225_M0 C225_M1: library part CAP-10P-0001, "10 pF ±5% 50V Ceramic Capacitor C0G, NP0 0603 (1608 Metric)", Capacitance="10 pF +/- 5%", Manufacturer="Walshin Technology Corporation", Package Size=0603, Temperature Coefficient="C0G, NP0", Voltage Rating=50V, Assembled?=Yes, Manufacturer Part Number=0603N100J500CT
C300: library part CAP-4.7U-0001, "4.7 µF ±10% 25V Ceramic Capacitor X5R 0603 (1608 Metric)", Capacitance="4.7uF +/-10%", Manufacturer="Taiyo Yuden", Package Size=0603, Temperature Coefficient=X5R, Voltage Rating=25V, Assembled?=no, Manufacturer Part Number=TMK107BBJ475KA-T
C404_M0 C404_M1 C405_M0 C405_M1: "1 µF ±10% 100V Ceramic Capacitor X7R 1206 (3216 Metric)", Capacitance="1 uF +/- 10%", Voltage=100V
D100 D101 D102 D400_M0 D400_M1 D401_M0 D401_M1: library part LED_Amber_0001, "CAP CER 0.1UF 100V X7R 0603", Color=Amber, Current Rating=20mA, Manufacturer="Wurth Electronik", Package Size=0603, Assembled?=no, Manufacturer Part Number=150060AS75000, Vf=2V
D200: library part DIO-69.4V-0001, "69.4V Clamp 8.7A Ipp Tvs Diode Surface Mount DO-214AA (SMBJ)", Breakdown VOltage=47.8V, Package="DO-214AA (SMBJ)", Peak pulser current=8.7A, Reverse working maximum voltage=43V, Channels=Bidirectional, Vclamp=69.4V
D201_M0 D201_M1: library part LED_Amber_0001, "Amber LED 0603", Color=Amber, Current Rating=20mA, Manufacturer="Wurth Electronik", Package Size=0603, Assembled?=no, Manufacturer Part Number=150060AS75000, Vf=2V
D402_M0 D402_M1 D403_M0 D403_M1 D408_M0 D408_M1 D409_M0 D409_M1 D410_M0 D410_M1 D411_M0 D411_M1 D412_M0 D412_M1 D413_M0 D413_M1: library part DIO-0.53V-0001, "Diode Schottky 60 V 3A Surface Mount SOD-128/CFP5", Current Rating=3A, Manufacturer="Nexperia USA Inc.", Package=SOD-128/CFP5, Vf (Voltage Forward)="530 mV", Assembled=no, Manufacturer Part Number=PMEG6030EP,115
D404_M0 D404_M1 D405_M0 D405_M1 D406_M0 D406_M1 D407_M0 D407_M1: library part DIO-19.9V-0001, "19.9V Clamp 30.2A Ipp Tvs Diode Surface Mount DO-214AA (SMBJ)", Breakdown VOltage=13.3, Current Rating=30.2A, Manufacturer="Littlefuse Inc.", Package="DO-214AA (SMBJ)", Standoff Voltage=12V, Assembled=No, Manufacturer Part Number=SMBJ12CA
I400_M0 I400_M1: library part IC-MUX-0001
I401_M0 I401_M1: library part IC-MUX-0001, "Multiplexer 1 x 2:1 8-VSSOP", Vin=1.65-5.5V
I402_M0 I402_M1 I403_M0 I403_M1: library part IC-GDRV-0001, "Gate Drivers Automotive 3-A, 120-V half bridge gate driver with 5-V UVLO and enable 8-SOIC -40 to 125", Load Voltage-Max=120V, Manufacturer="Texas Instruments", Package=SOIC-8, Supply Current=3A, Assembled?=no, Manufacturer Part Number=UCC27284QDQ1, VCC-Max=16V, VCC-Min=5.5V
L200_M0 L200_M1: library part PWRIND-10U-0002, "10 µH Shielded Drum Core, Wirewound Inductor 10 A 16.8mOhm Max Nonstandard", Inductance="10 uH", Tolerance="+/- 20%", Assembled?=No, DCI="10 A", DCR="16.8 mOhm", Isat=16A
LM200_M0 LM200_M1: library part IC-BUCK-0006, "Buck Switching Regulator IC Positive Adjustable 1V 1 Output 5A 30-WFQFN Exposed Pad", Current=5A, Manufacturer="Texas Instruments", Package=30-WFQFN, Assembled?=no, Manufacturer Part Number=LM76005RNPR, Type=Buck
P1: "Header, 3-Pin", LatestRevisionDate=17-Jul-2002, LatestRevisionNote="Re-released for DXP Platform.", Publisher="Altium Limited"
Q200: library part NMOS-60A-0001, "N-Channel 60 V 60A (Tc) 81W (Tc) Surface Mount 8-SOP Advance (5x5)", Drain Current=60A, Package=8-PowerVDFN, Vdss=60V, Vgs="2.5V @ 220uA", Vgs(Max)=20V
Q201_M0 Q201_M1: library part NMOS-200MA-0001, "MOSFET N-CH 60V 200MA SOT23", Manufacturer=Toshiba, Package=SOT-23-3, Assembled?=no, FET type=N-Channel, Id-Continuous=200mA, Manufacturer Part Number=T2N7002AK,LM, Rds On-Max=3.9Ohm, VDS-Max=60V, Vgs-Max=20V
Q400_M0 Q400_M1 Q401_M0 Q401_M1 Q402_M0 Q402_M1 Q403_M0 Q403_M1: library part NMOS-26A-0001, "MOSFET N-CH 60V 200MA SOT23", Manufacturer=Toshiba, Package="8-TSON Advance", Assembled?=no, FET type=N-Channel, Id-Continuous=26A, Manufacturer Part Number=TPN11006PL,LQ, Rds On-Max=18.1mOhm, VDS-Max=60V, Vgs-Max=20V
R100 R101: library part RES-4.7K-0002, "RES SMD 4.7K OHM 1% 1/10W 0603", Manufacturer=YAGEO, Package Size=0603, Power="0.1 W", Resistance="4.7k Ohm", Tolerance=1%, Assembled?=no, Manufacturer Part Number=AF0603FR-074K7L
R102 R103 R104: library part RES-100-0002, "100 Ohms ±1% 0.1W, 1/10W Chip Resistor 0603 (1608 Metric) Automotive AEC-Q200 Thick Film", Manufacturer=YAGEO, Package Size=0603, Power="0.1 W", Resistance="100 Ohm", Tolerance=1%, Assembled?=no, Manufacturer Part Number=AC0603FR-10100RL
R200: library part RES-200K-0001, "200 kOhms ±1% 0.1W, 1/10W Chip Resistor 0603 (1608 Metric) Automotive AEC-Q200 Thick Film", Manufacturer="Panasonic Electronic Components", Package Size=0603, Power Rating="0.1 W", Resistance="200k +/- 1%", Assembled?=Yes, MFP=ERJ-3EKF2003V
R201 R207_M0 R207_M1: library part RES-100K-0003, "100 kOhms ±1% 0.1W, 1/10W Chip Resistor 0603 (1608 Metric) Moisture Resistant Thick Film", Package Size=0603, Power="1/10 W", Resistance="100 kOhm", Tolerance="+/- 1%", Assembled?=No
R202: library part RES-2.15M-0001, "2.15 MOhms ±1% 0.1W, 1/10W Chip Resistor 0603 (1608 Metric) Moisture Resistant Thick Film", Package Size=0603, Power="0.1 W", Resistance="2.15M Ohm", Tolerance=1%, Assembled?=No
R203: library part RES-100K-0003, "100 kOhms ±1% 0.1W, 1/10W Chip Resistor 0603 (1608 Metric) Moisture Resistant Thick Film", Package Size=0603, Power="0.1 W", Resistance="100k Ohm", Tolerance=1%, Assembled?=No
R204_M0 R204_M1: library part RES-100-0002, "100 Ohms ±1% 0.1W, 1/10W Chip Resistor 0603 (1608 Metric) Automotive AEC-Q200 Thick Film", Manufacturer=YAGEO, Package Size=0603, Power Rating=1/10W, Resistance="100Ohm +/-1%", Assembled?=no, Manufacturer Part Number=AC0603FR-10100RL
R205_M0 R205_M1: library part RES-10K-0002, "RES SMD 10K OHM 1% 1/10W 0603", Manufacturer=YAGEO, Package Size=0603, Power Rating=1/10W, Resistance="10kOhm +/-1%", Assembled?=no, Manufacturer Part Number=RC0603FR-0710KP
R206_M0 R206_M1: library part RES-76.8K-0001, "76.8 kOhms ±1% 0.1W, 1/10W Chip Resistor 0603 (1608 Metric) Moisture Resistant Thick Film", Manufacturer=Yageo, Package Size=0603, Power="0.1 W", Resistance="76.8k Ohm", Tolerance=1%
R208_M0 R208_M1: library part RES-9.09K-0001, "9.09 kOhms ±1% 0.1W, 1/10W Chip Resistor 0603 (1608 Metric) Moisture Resistant Thick Film", Package Size=0603, Power="1/10 W", Resistance="9.09 kOhm", Tolerance=+/-1%, Assembled?=No
R300: library part RES-120-0002, "120 Ohms ±1% 0.5W, 1/2W Chip Resistor 1206 (3216 Metric) Thick Film", Package Size=1206, Power="0.5 W", Resistance="120 Ohm", Tolerance=1%
R301: library part RES-4.7K-0001, "RES SMD 4.7K OHM 1% 1/16W 0402", Manufacturer=YAGEO, Package Size=0402, Power Rating=1/16W, Resistance="4.7kOhm +/-1%", Assembled?=no, Manufacturer Part Number=RC0402FR-074K7P
R400_M0 R400_M1 R401_M0 R401_M1: library part RES-100-0001, "RES SMD 100 OHM 5% 1/16W 0402", Manufacturer=YAGEO, Package Size=0402, Power Rating=1/16W, Resistance="100Ohm +/-5%", Assembled?=no, Manufacturer Part Number=RC0402JR-07100RP
R402_M0 R402_M1 R403_M0 R403_M1: library part RES-1-0001, "1 Ohms ±1% 0.125W, 1/8W Chip Resistor 0603 (1608 Metric) Anti-Sulfur Thin Film", Power="1/8 W", Resistance="1 Ohms ±1%"
R404_M0 R404_M1 R405_M0 R405_M1 R406_M0 R406_M1 R407_M0 R407_M1 R408_M0 R408_M1 R409_M0 R409_M1 R410_M0 R410_M1 R411_M0 R411_M1: library part RES-33-0001, "RES SMD 33 OHM 5% 1/16W 0402", Manufacturer=YAGEO, Package Size=0402, Power Rating=1/16W, Resistance="33Ohm +/-5%", Assembled?=no, Manufacturer Part Number=RC0402JR-0733RP
TP200 TP201 TP202 TP203_M0 TP203_M1 TP204_M0 TP204_M1: library part TEST-POINT-0001, "Oranange PC Test Point, Miniature Phoisphor Bronze Silver Plating Through Hole Mounting Type"
U100: library part IC-STM32G431CBU6, "128KB 1.71V~3.6V ARM-MSeries 32KB 170MHz FLASH 42 UFQFPN-48(7x7) Microcontroller Units (MCUs/MPUs/SOCs) ROHS", Package=UFQFPN-48, Assembled?=no, Manufacturer Part Number=STM32G431CBU6
U200: library part IC-LDO-3.3V-0002, "Linear Voltage Regulator IC Positive Fixed 1 Output 500mA SOT-223-4", Current="500 mA", Package=SOT-223-4, Vin=25V, Vout=3.3V
U201: library part IC-LDO-5V-0003, "Linear Voltage Regulator IC Positive Fixed 1 Output 500mA SOT-223-4", Current="500 mA", Manufacturer="Texas Instruments", Package Size=SOT223-4, Assembled?=no, Manufacturer Part Number=UA78M05IDCYR, Type="Low dropout (LDO)"
U300: library part IC-CAN-TRANSCEIVER-0002, "1/1 Transceiver CANbus 8-VSON (3x3)", Manufacturer="Texas Instrument", CAN Capability=FD-CAN, Manufacturer Part Number=TCAN1042HGDRBTQ1
X1 X5: library part "Micro-Fit Molex 8 Pin 2 Row Vertical", Package=43045-0812, DeviceName=43045-0812, DeviceSetName=HEADER_POS8_?, GateName_1=G$1, LibraryName=con-molex-micro-fit-3_0_2, SymbolName_1=HEADER_POS8
X2 X4: library part HEADER_POS2_?43045-0212, Package=43045-0212, DeviceName=43045-0212, DeviceSetName=HEADER_POS2_?, GateName_1=G$1, LibraryName=con-molex-micro-fit-3_0_2, SymbolName_1=HEADER_POS2
X3 X6 X8 X10: library part "Micro-Fit Molex 4 Pin 2 Row Vertical", Package=43045-0412, DeviceName=43045-0412, DeviceSetName=HEADER_POS4_?, GateName_1=G$1, LibraryName=con-molex-micro-fit-3_0_2, SymbolName_1=HEADER_POS4
X7: library part "Micro-Fit Molex 2 Pin Vertical", Package=43650-0215, DeviceName=43650-0215, DeviceSetName=HEADER_POS2_?, GateName_1=G$1, LibraryName=con-molex-micro-fit-3_0_2, SymbolName_1=HEADER_POS2
X9: library part "Micro-Fit Molex 6 Pin 2 Row Vertical", Package=43045-0612, DeviceName=43045-0612, DeviceSetName=HEADER_POS6_?, GateName_1=G$1, LibraryName=con-molex-micro-fit-3_0_2, SymbolName_1=HEADER_POS6

## Via types
v1: diameter 11.81, hole 7.87, Top Layer to Bottom Layer, 24 vias
v2: diameter 16, hole 8, Top Layer to Bottom Layer, 2 vias
v3: diameter 20, hole 10, Top Layer to Bottom Layer, 1 vias

## Nets (pads, with @x,y where several pads share a name; then routed paths per layer and width w, separated by ;. In a path a pad name is that pad's centre, name@x,y a point inside that pad or via, vN(x,y) a via of type N, cw(c..) or ccw(c..) an arc to the next point about the centre after c; other vN are vias at no path point)
`_M0: I400_M0.6 I401_M0.6 U100.28
`_M1: I400_M1.6 I401_M1.6 U100.29
BIAS_M0: C200.1 C210.1 C213_M0.1 C215_M0.1 C216_M0.1 C217_M0.1 C218_M0.1 C219_M0.1 C221_M0.1 C222_M0.1 C223_M0.1 C224_M0.1 C225_M0.1 C402_M0.1 C403_M0.1 C404_M0.1 C405_M0.1 D402_M0.2 D403_M0.2 L200_M0.2 LM200_M0.9 Q400_M0.3 Q401_M0.3 R207_M0.1 R402_M0.2 R403_M0.2 TP204_M0.1 U200.1 U201.1 | length 185
  Top Layer w10: LM200_M0.9 2350.47,1557.99 2350.47,1535.28 2355.71,1530.04 2355.71,1529.7 2371.1,1514.31 2387.37,1514.31 2415.43,1486.25 2416.42,1486.25 2433.07,1469.59 C213_M0.1 ; v2(2437.01,1720.47) C221_M0.1
BIAS_M1: C213_M1.1 C215_M1.1 C216_M1.1 C217_M1.1 C218_M1.1 C219_M1.1 C221_M1.1 C222_M1.1 C223_M1.1 C224_M1.1 C225_M1.1 C402_M1.1 C403_M1.1 C404_M1.1 C405_M1.1 D402_M1.2 D403_M1.2 L200_M1.2 LM200_M1.9 Q400_M1.3 Q401_M1.3 R207_M1.1 R402_M1.2 R403_M1.2 TP204_M1.1
BOOT_M0: C220_M0.1 LM200_M0.6
BOOT_M1: C220_M1.1 LM200_M1.6
CAN_N: R300.1 U300.6 X8.P$3 X10.P$3 | length 5.9
  Top Layer w7: U300.6 U300.6@1093.82,1426.02
CAN_P: R300.2 U300.7 X8.P$1 X10.P$1 | length 5.9
  Top Layer w7: U300.7 U300.7@1068.23,1426.02
CAN_STB: R301.1 U100.38 U300.8
CAN_VCC: C211.1 C300.1 C301.1 TP201.1 U201.3 U300.3 X3.P$4 X6.P$4
DEBUG_LED_0: D100.1 U100.9
DEBUG_LED_1: D101.1 U100.10
DEBUG_LED_2: D102.1 U100.11
DIR_1_In_M0: I401_M0.5 I402_M0.5 I403_M0.6 R401_M0.1
DIR_1_In_M1: I401_M1.5 I402_M1.5 I403_M1.6 R401_M1.1
DIR_2_In_M0: I400_M0.5 I402_M0.6 I403_M0.5 R400_M0.1
DIR_2_In_M1: I400_M1.5 I402_M1.6 I403_M1.5 R400_M1.1
FB_M0: C221_M0.2 LM200_M0.12 R207_M0.2 R208_M0.1
FB_M1: C221_M1.2 LM200_M1.12 R207_M1.2 R208_M1.1
FDCAN_RX: U100.33 U300.4
FDCAN_TX: U100.34 U300.1
GND: C100.2 C101.2 C102.2 C103.2 C104.2 C105.2 C106.2 C107.2 C200.2 C201.2 C202.2 C203.2 C204.2 C205.2 C206.2 C207.2 C208.2 C209.2 C210.2 C211.2 C215_M0.2 C215_M1.2 C216_M0.2 C216_M1.2 C217_M0.2 C217_M1.2 C218_M0.2 C218_M1.2 C219_M0.2 C219_M1.2 C222_M0.2 C222_M1.2 C223_M0.2 C223_M1.2 C224_M0.2 C224_M1.2 C225_M0.2 C225_M1.2 C300.2 C301.2 C400_M0.2 C400_M1.2 C401_M0.1 C401_M1.1 C402_M0.2 C402_M1.2 C403_M0.2 C403_M1.2 C404_M0.2 C404_M1.2 C405_M0.2 C405_M1.2 D200.2 D400_M0.2 D400_M1.2 D401_M0.2 D401_M1.2 D404_M0.1 D404_M1.1 D405_M0.1 D405_M1.1 D408_M0.1 D408_M1.1 D411_M0.1 D411_M1.1 I400_M0.2 I400_M0.4 I400_M1.2 I400_M1.4 I401_M0.1 I401_M0.4 I401_M1.1 I401_M1.4 I402_M0.7 I402_M1.7 I403_M0.7 I403_M1.7 LM200_M0.13 LM200_M0.14 LM200_M0.15 LM200_M0.17 LM200_M0.19 LM200_M0.24 LM200_M0.25 LM200_M0.26 LM200_M0.27 LM200_M0.28 LM200_M0.29 LM200_M0.30 LM200_M0.31 LM200_M1.13 LM200_M1.14 LM200_M1.15 LM200_M1.17 LM200_M1.19 LM200_M1.24 LM200_M1.25 LM200_M1.26 LM200_M1.27 LM200_M1.28 LM200_M1.29 LM200_M1.30 LM200_M1.31 P1.3 Q200.3 Q201_M0.2 Q201_M1.2 Q402_M0.2 Q402_M1.2 Q403_M0.2 Q403_M1.2 R102.2 R103.2 R104.2 R201.2 R203.2 R208_M0.2 R208_M1.2 R301.2 U100.49 U200.2 U201.2 U300.2 U300.9 X1.P$1 X1.P$2 X1.P$3 X1.P$4 X3.P$2 X5.P$1 X5.P$2 X5.P$3 X5.P$4 X6.P$2 X8.P$2 X8.P$4 X9.P$3 X9.P$4 X9.P$6 X10.P$2 X10.P$4
  other v1: 1079.06,1343.35 1043.62,1365 1118.43,1365 1081.02,1386.65 2246.46,1604.33 2291.34,1604.33 2336.22,1604.33 2224.02,1629.92 2268.9,1629.92 2313.78,1629.92 2358.66,1629.92 2246.46,1655.51 2291.34,1655.51 2336.22,1655.51 5178.39,7267.05 5223.27,7267.05 5268.15,7267.05 5155.94,7292.64 5200.83,7292.64 5245.71,7292.64 5290.59,7292.64 5178.39,7318.23 5223.27,7318.23 5268.15,7318.23
HO_1G_M0: D407_M0.2 D413_M0.2 I402_M0.3 R410_M0.2
HO_1G_M1: D407_M1.2 D413_M1.2 I402_M1.3 R410_M1.2
HO_1M_M0: Q401_M0.1 R411_M0.2
HO_1M_M1: Q401_M1.1 R411_M1.2
HO_2G_M0: D406_M0.2 D412_M0.2 I403_M0.3 R408_M0.2
HO_2G_M1: D406_M1.2 D412_M1.2 I403_M1.3 R408_M1.2
HO_2M_M0: Q400_M0.1 R409_M0.2
HO_2M_M1: Q400_M1.1 R409_M1.2
I2C1_SCL: R100.1 U100.46 X9.P$5 | length 1
  Top Layer w10: R100.1@439.96,1484.25 R100.1
I2C1_SDA: R101.1 U100.47 X9.P$2
LO_1_M0: D404_M0.2 D409_M0.2 I402_M0.8 R406_M0.2
LO_1_M1: D404_M1.2 D409_M1.2 I402_M1.8 R406_M1.2
LO_2_M0: D405_M0.2 D410_M0.2 I403_M0.8 R407_M0.2
LO_2_M1: D405_M1.2 D410_M1.2 I403_M1.8 R407_M1.2
M0_PWM: I400_M0.1 I401_M0.2 U100.27
M1_PWM: I400_M1.1 I401_M1.2 U100.30
M+_M0: C406_M0.2 D402_M0.1 D407_M0.1 D408_M0.2 I402_M0.4 Q401_M0.2 Q403_M0.3 X2.P$1
M+_M1: C406_M1.2 D402_M1.1 D407_M1.1 D408_M1.2 I402_M1.4 Q401_M1.2 Q403_M1.3 X4.P$1
M-_M0: C407_M0.2 D403_M0.1 D406_M0.1 D411_M0.2 I403_M0.4 Q400_M0.2 Q402_M0.3 X2.P$2
M-_M1: C407_M1.2 D403_M1.1 D406_M1.1 D411_M1.2 I403_M1.4 Q400_M1.2 Q402_M1.3 X4.P$2
MCU_VBAT: C100.1 C101.1 C102.1 C103.1 C104.1 C105.1 C106.1 C107.1 C201.1 C400_M0.1 C400_M1.1 C401_M0.2 C401_M1.2 I400_M0.8 I400_M1.8 I401_M0.8 I401_M1.8 R100.2 R101.2 TP200.1 U100.1 U100.20 U100.21 U100.23 U100.35 U100.48 U200.3 X9.P$1 | length 29.4
  Top Layer w10: U100.20 U100.20@691.85,767.8 ; U100.21 U100.21@711.54,767.8 ; U100.23 U100.23@750.91,767.8 ; C102.1@796.05,726.3 812.7,709.65 C102.1 ; C106.1 C106.1@874.02,709.65
MOTOR_EN: LM200_M0.18 LM200_M1.18 R202.1 R203.1
MOTOR_VCC: C212_M0.1 C212_M1.1 LM200_M0.8 LM200_M1.8 R204_M0.1 R204_M1.1 R205_M0.2 R205_M1.2 | length 98.5
  Top Layer w10: LM200_M0.8 v3(2330.71,1519.68) C212_M0.1@2369.28,1481.11 ; R205_M0.2@2511.81,1413.39 R205_M0.2
NetC212_M0_2: C212_M0.2 C212_M1.2 C213_M0.2 C213_M1.2 C214_M0.2 C214_M1.2 R206_M0.2 R206_M1.2
NetC214_M0_1: C214_M0.1 LM200_M0.11 | length 112.6
  Top Layer w10: LM200_M0.11 2443.9,1558.07 2461.4,1575.57 2471.54,1575.57 C214_M0.1
NetC214_M1_1: C214_M1.1 LM200_M1.11
NetC406_M0_1: C406_M0.1 I402_M0.2
NetC406_M1_1: C406_M1.1 I402_M1.2
NetC407_M0_1: C407_M0.1 I403_M0.2
NetC407_M1_1: C407_M1.1 I403_M1.2
NetD100_2: D100.2 R102.1
NetD101_2: D101.2 R103.1
NetD102_2: D102.2 R104.1
NetD201_M0_1: D201_M0.1 R204_M0.2
NetD201_M0_2: D201_M0.2 Q201_M0.3
NetD201_M1_1: D201_M1.1 R204_M1.2
NetD201_M1_2: D201_M1.2 Q201_M1.3
NetD400_M0_1: D400_M0.1 R400_M0.2
NetD400_M1_1: D400_M1.1 R400_M1.2
NetD401_M0_1: D401_M0.1 R401_M0.2
NetD401_M1_1: D401_M1.1 R401_M1.2
NetD409_M0_1: D409_M0.1 R404_M0.1 R406_M0.1
NetD409_M1_1: D409_M1.1 R404_M1.1 R406_M1.1
NetD410_M0_1: D410_M0.1 R405_M0.2 R407_M0.1
NetD410_M1_1: D410_M1.1 R405_M1.2 R407_M1.1
NetD412_M0_1: D412_M0.1 R408_M0.1 R409_M0.1
NetD412_M1_1: D412_M1.1 R408_M1.1 R409_M1.1
NetD413_M0_1: D413_M0.1 R410_M0.1 R411_M0.1
NetD413_M1_1: D413_M1.1 R410_M1.1 R411_M1.1
NetI402_M0_1: I402_M0.1 R403_M0.1
NetI402_M1_1: I402_M1.1 R403_M1.1
NetI403_M0_1: I403_M0.1 R402_M0.1
NetI403_M1_1: I403_M1.1 R402_M1.1
NetLM200_M0_10: LM200_M0.10 R206_M0.1 | length 140.3
  Top Layer w10: LM200_M0.10 2370.16,1557.99 2370.16,1539.29 2378.14,1531.31 2487.79,1531.31 R206_M0.1
NetLM200_M1_10: LM200_M1.10 R206_M1.1
NetQ200_1: Q200.1 R200.1 R201.1
NetQ200_2: Q200.2 X7.P$1
NetQ402_M0_1: Q402_M0.1 R405_M0.1
NetQ402_M1_1: Q402_M1.1 R405_M1.1
NetQ403_M0_1: Q403_M0.1 R404_M0.2
NetQ403_M1_1: Q403_M1.1 R404_M1.2
NetU100_2: U100.2 X1.P$5
NetU100_3: U100.3 X1.P$6
NetU100_4: U100.4 X1.P$7
NetU100_5: U100.5 X1.P$8
NetU100_16: U100.16 X5.P$5
NetU100_17: U100.17 X5.P$6
NetU100_18: U100.18 X5.P$7
NetU100_19: U100.19 X5.P$8
PGOOD_M0: LM200_M0.16 Q201_M0.1 R205_M0.1 | length 52.1
  Top Layer w10: LM200_M0.16 2389.76,1720.47 v2(2413.39,1744.09)
PGOOD_M1: LM200_M1.16 Q201_M1.1 R205_M1.1
QUAD_0_A: U100.44 X3.P$1
QUAD_0_B: U100.45 X3.P$3
QUAD_1_A: U100.14 X6.P$1
QUAD_1_B: U100.12 X6.P$3
SW_M0: C220_M0.2 L200_M0.1 LM200_M0.1 LM200_M0.2 LM200_M0.3 LM200_M0.4 LM200_M0.5 TP203_M0.1
SW_M1: C220_M1.2 L200_M1.1 LM200_M1.1 LM200_M1.2 LM200_M1.3 LM200_M1.4 LM200_M1.5 TP203_M1.1
SWCLK: P1.1 U100.37
SWDIO: P1.2 U100.36
VBAT: C202.1 C203.1 C204.1 C205.1 C206.1 C207.1 C208.1 C209.1 D200.1 LM200_M0.20 LM200_M0.21 LM200_M0.22 LM200_M1.20 LM200_M1.21 LM200_M1.22 R200.2 R202.2 TP202.1 X7.P$2
pads on no net: I400_M0.3 I400_M0.7 I400_M1.3 I400_M1.7 I401_M0.3 I401_M0.7 I401_M1.3 I401_M1.7 LM200_M0.7 LM200_M0.23 LM200_M1.7 LM200_M1.23 U100.6 U100.7 U100.8 U100.13 U100.15 U100.22 U100.24 U100.25 U100.26 U100.31 U100.32 U100.39 U100.40 U100.41 U100.42 U100.43 U300.5 X1.1 X2.1 X3.1 X4.1 X5.1 X6.1 X7.1 X8.1 X9.1 X10.1

## Silkscreen, mask and mechanical layers (free items; w line width, h text height)
Top Overlay:
  text "|G|P|" at 1294.4,1961.5 h30 r270
  text "|G|N|" at 1377.08,1961.5 h30 r270